# EAGLE board beetle_v02 (EAGLE 7.2.0)
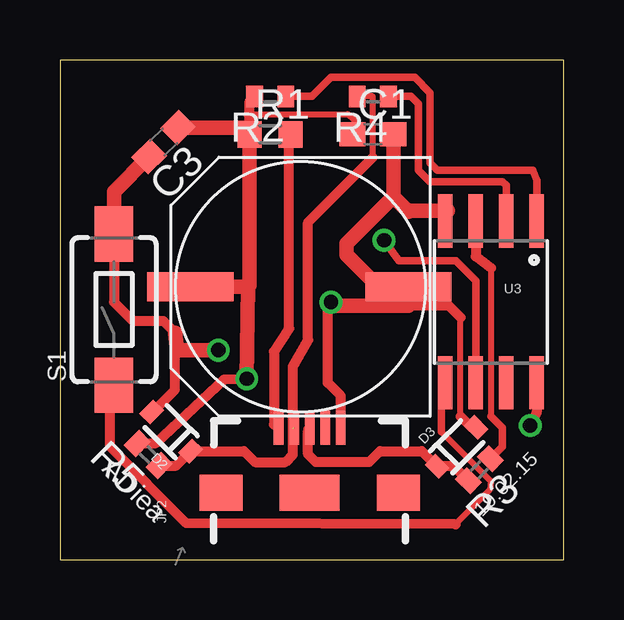
[diagram p0: board, top side]
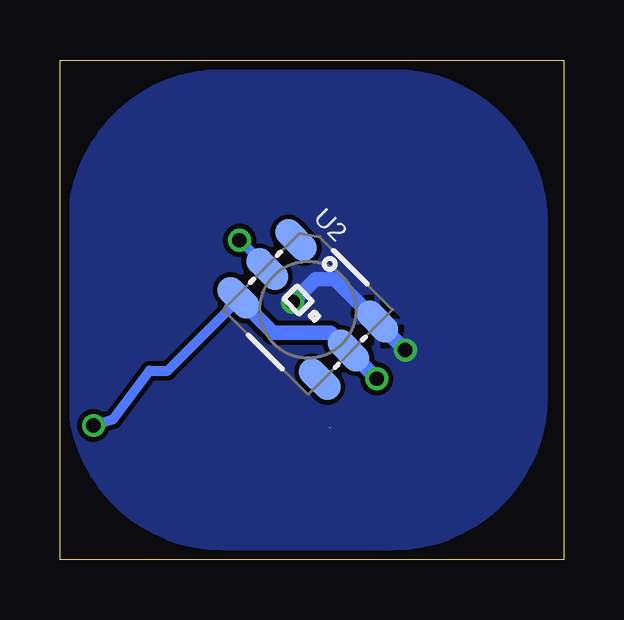
[diagram p1: board, bottom side, seen from below]

Size 21.01 x 20.82 mm. Coordinates in mm from the lower left corner, seen from the top.
Outline: 0,0 21.01,0 21.01,20.82 0,20.82 0,0
Copper layers (1*16): Top 0.0356mm / dielectric 1.5011mm / Bottom 0.0356mm
Design rules "LaenPCBOrder": minimum track width 6mil, minimum drill 13mil, track to track 6mil, track to pad 6mil, pad to pad 6mil, via to via 6mil, smd to smd 6mil, copper to edge 15mil, drill to drill 6mil, minimum pad ring 7mil, minimum via ring 7mil, stop-mask expansion 3mil, vias tented up to drill 0mil, thermal gap 10mil

## Footprints (pad centres in the part's own frame; a part is rotated, then mirrored left to right if it is on the bottom)
C0603 = smd 1.1 x 1: 1 -0.85,0; 2 0.85,0
SOD-323 = smd 0.63 x 0.83: A 1.15,0; C -1.15,0
USB-B-MICRO-SMD_V03 = smd 1.4 x 0.4: D+1 2.7,0; D-1 2.7,0.65; GND1 2.7,-1.3; ID1 2.7,-0.65; VBUS1 2.7,1.3 | smd 1.5 x 1.8: SHIELD1 0,3.7; SHIELD2 0,-3.7 | smd 1.5 x 2.5: SHIELD3 0,0
R0603 = smd 1 x 1.1: 1 -0.85,0; 2 0.85,0
R0402 = smd 0.7 x 0.9: 1 -0.65,0; 2 0.65,0
TACTILE-SWITCH-1101NE = smd 2.3 x 1.6: 1 -3.15,0; 2 3.15,0
LED-TRICOLOR-5050-IC = smd 2 x 1.1: 1 -2.4,1.7; 2 -2.4,0; 3 -2.4,-1.7; 4 2.4,-1.7; 5 2.4,0; 6 2.4,1.7
SO08-EIAJ = smd 0.61 x 2.21: 1 -1.905,-3.378; 2 -0.635,-3.378; 3 0.635,-3.378; 4 1.905,-3.378; 5 1.905,3.353; 6 0.635,3.353; 7 -0.635,3.353; 8 -1.905,3.353
FC0H104ZFTBR24 = smd 3.6 x 1.2: P$1 -4.5,0; PLUS$2 4.6,0

## Placement (x,y rotation side)
C1  [C0603]  13.05,17.72 0 top
C3  [C0603]  4.32,17.4 225 top
D2  3.3V  [SOD-323]  4.64,5.33 135 top
D3  3.3V  [SOD-323]  16.54,4.7 45 top
JP2  USB_MICROB_PLUGCONN-11752  [USB-B-MICRO-SMD_V03]  10.41,2.79 90 top
R1  [R0603]  8.76,17.72 0 top
R2  [R0402]  8.76,19.3 180 top
R3  [R0402]  17.49,3.75 225 top
R4  [R0402]  13.05,19.3 180 top
R5  [R0402]  3.68,4.38 135 top
S1  SWITCH-MOMENTARY-2SMD-1101NE  [TACTILE-SWITCH-1101NE]  2.25,10.41 90 top
U2  WS2811  [LED-TRICOLOR-5050-IC]  10.67,10.41 315 bottom
U3  Tiny85-20-SMT  [SO08-EIAJ]  17.97,10.73 180 top
U$1  FC0H104ZFTBR24  [FC0H104ZFTBR24]  10.03,11.37 180 top

## Library data of the parts
C1 C3 = eagle-ltspice; SPICEMODEL: NONE; SPICEPREFIX: C
D2 D3 = SparkFun-DiscreteSemi; PROD_ID: DIO-11284
JP2 = SparkFun-Connectors; PROD_ID: CONN-11752
R1-R5 = eagle-ltspice; SPICEMODEL: NONE; SPICEPREFIX: R
S1 = SparkFun-Electromechanical; PROD_ID: SWCH-00815
U2 = SparkFun-LED; PROD_ID: DIO-11598
U3 = SparkFun-DigitalIC; PROD_ID: IC-09092
U$1 = mylib

## Nets
+5V: C1.1 C3.1 R1.1 R2.2 R5.2 U2.3 U2.5 U3.8 U$1.PLUS$2
GND: C1.2 C3.2 D2.A D3.A JP2.GND1 S1.2 U2.6 U3.4 U$1.P$1
N$1: JP2.VBUS1 R1.2
N$2: S1.1 U3.5
N$3: D3.C JP2.D+1 R3.2
N$4: R4.1 U3.2
N$5: R2.1 U3.1
N$7: U2.2 U3.6
N$8: D2.C JP2.D-1 R4.2 R5.1
N$9: R3.1 U3.3

## Tracks (layer width: path | path; a pad name or v marks a point on that pad's centre or on a via)
+5V  (via drill 0.6)
  Top 0.254: 7.87,18.56 11.99,18.56 12.26,18.35 12.26,17.77
  Top 0.305: 12.26,17.77 C1.1
  Top 0.406: 7.63,18 R1.1 | R1.1 7.91,19.1 R2.2 | R1.1 7.91,18.45 7.87,18.56 | R5.2 3.24,4.86 4,4.86 6.86,7.51 v7.79,7.54 | U3.8 19.88,6.16 v19.61,5.59
  Top 0.61: C3.1 7.63,18 | R1.1 7.91,11.42 7.84,11.37 | v7.79,7.54 7.84,11.37 | 7.84,11.37 U$1.PLUS$2
  Bottom 0.406: v19.61,5.59 18.8,5.84 17.27,7.87 16.51,7.87 13.97,10.41 13.97,10.51 U2.3
  Bottom 0.61: v7.79,7.53 v7.79,7.54 U2.5 9.72,9.46 12.12,9.46 U2.3 13.57,10.93
GND  (via drill 0.6)
  Top 0.254: 16.7,5.97 16.7,10.1
  Top 0.406: 16.18,14.54 U3.4 | D2.A 3.86,6.15 4.79,7.08 4.79,9.46 4.32,9.94 3.05,9.94 2.25,10.73 S1.2 2.25,14.36 | 15.27,11.37 U$1.P$1 14.53,10.57 16.22,10.57 16.7,10.1 | D3.A 17.16,5.51 16.7,5.97 | JP2.GND1 11.71,6.83 11.18,7.37 11.18,10.6 v11.3,10.73
  Top 0.61: 13.9,15.12 14.53,14.49 14.53,14.54 16.18,14.54 | 13.9,15.12 C1.2 | C3.2 2.25,15.34 S1.2 | 4.79,9.46 4.89,8.73 v6.6,8.73 | 14.37,11.21 U$1.P$1 13.27,11.37 11.94,12.7 11.94,13.16 13.9,15.12 | v11.3,10.73 11.46,10.57 14.53,10.57
  Bottom 0.61: v6.6,8.73 7.77,9.9 U2.6 9.53,11.68 10.35,11.68 v11.3,10.73
  pour Bottom (isolate 0.203, rank 6): 20.57,13.97 20.57,6.86 arc-90 14.22,0.51 7.11,0.51 arc-90 0.76,6.86 0.76,13.97 arc-90 7.11,20.32 14.22,20.32 arc-90
N$1
  Top 0.406: R1.2 9.56,17.66 9.56,9.62 8.92,8.67 8.92,5.62 arc-45 9.03,5.58 JP2.VBUS1
N$2
  Top 0.254: 15.91,5.33 17.97,3.27 17.92,2.9 16.49,1.47
  Top 0.305: 15.91,5.33 15.91,7.22 U3.5
  Top 0.406: 16.49,1.47 5.27,1.52 2.1,4.7 2.1,6.29 2.25,6.45 S1.1 2.1,7.56
N$3
  Top 0.406: R3.2 16.4,3.92 15.85,3.92 D3.C 15.09,4.52 13.35,4.52 12.89,4.06 10.67,4.06 10.35,4.38 10.35,5.34 arc-45 JP2.D+1
N$4
  Top 0.305: R4.1 14.64,19.3 14.95,18.99 14.95,16.22 15.43,15.75 18.45,15.75 18.61,15.59 U3.2
N$5
  Top 0.305: R2.1 10.51,19.3 11.3,20.1 14.8,20.1 15.43,19.46 15.43,16.54 15.75,16.22 19.72,16.22 19.88,15.81 U3.1
N$7  (via drill 0.6)
  Top 0.305: U3.6 17.34,11.62 16.51,12.45 14.13,12.45 v13.52,13.31
  Bottom 0.406: U2.2 12.37,12.21 v13.52,13.31
N$8  (1 unrouted)
  Top 0.254: 13.05,16.76 13.05,19.3 R4.2
  Top 0.406: R5.1 4.85,3.92 D2.C 7.67,4.52 8.13,4.06 9.4,4.06 9.72,4.38 9.72,5.48 | 13.05,16.76 10.35,14.06 10.35,9.14 9.7,8.02 9.7,5.65 arc45 JP2.D-1
N$9
  Top 0.254: 17.97,12.16 17.97,5.97
  Top 0.305: 17.97,5.97 18.45,5.49 18.45,4.7 R3.1
  Top 0.406: U3.3 17.34,12.64 17.97,12.16

## Text on the board
tPlace: 19.02.15 | ADiea
bStop: F:/Documents and Settings/Andrei/Desktop/cercei_floral_1_monocrome.bmp